# Allegro board DIGITALCONVERTOR.brd
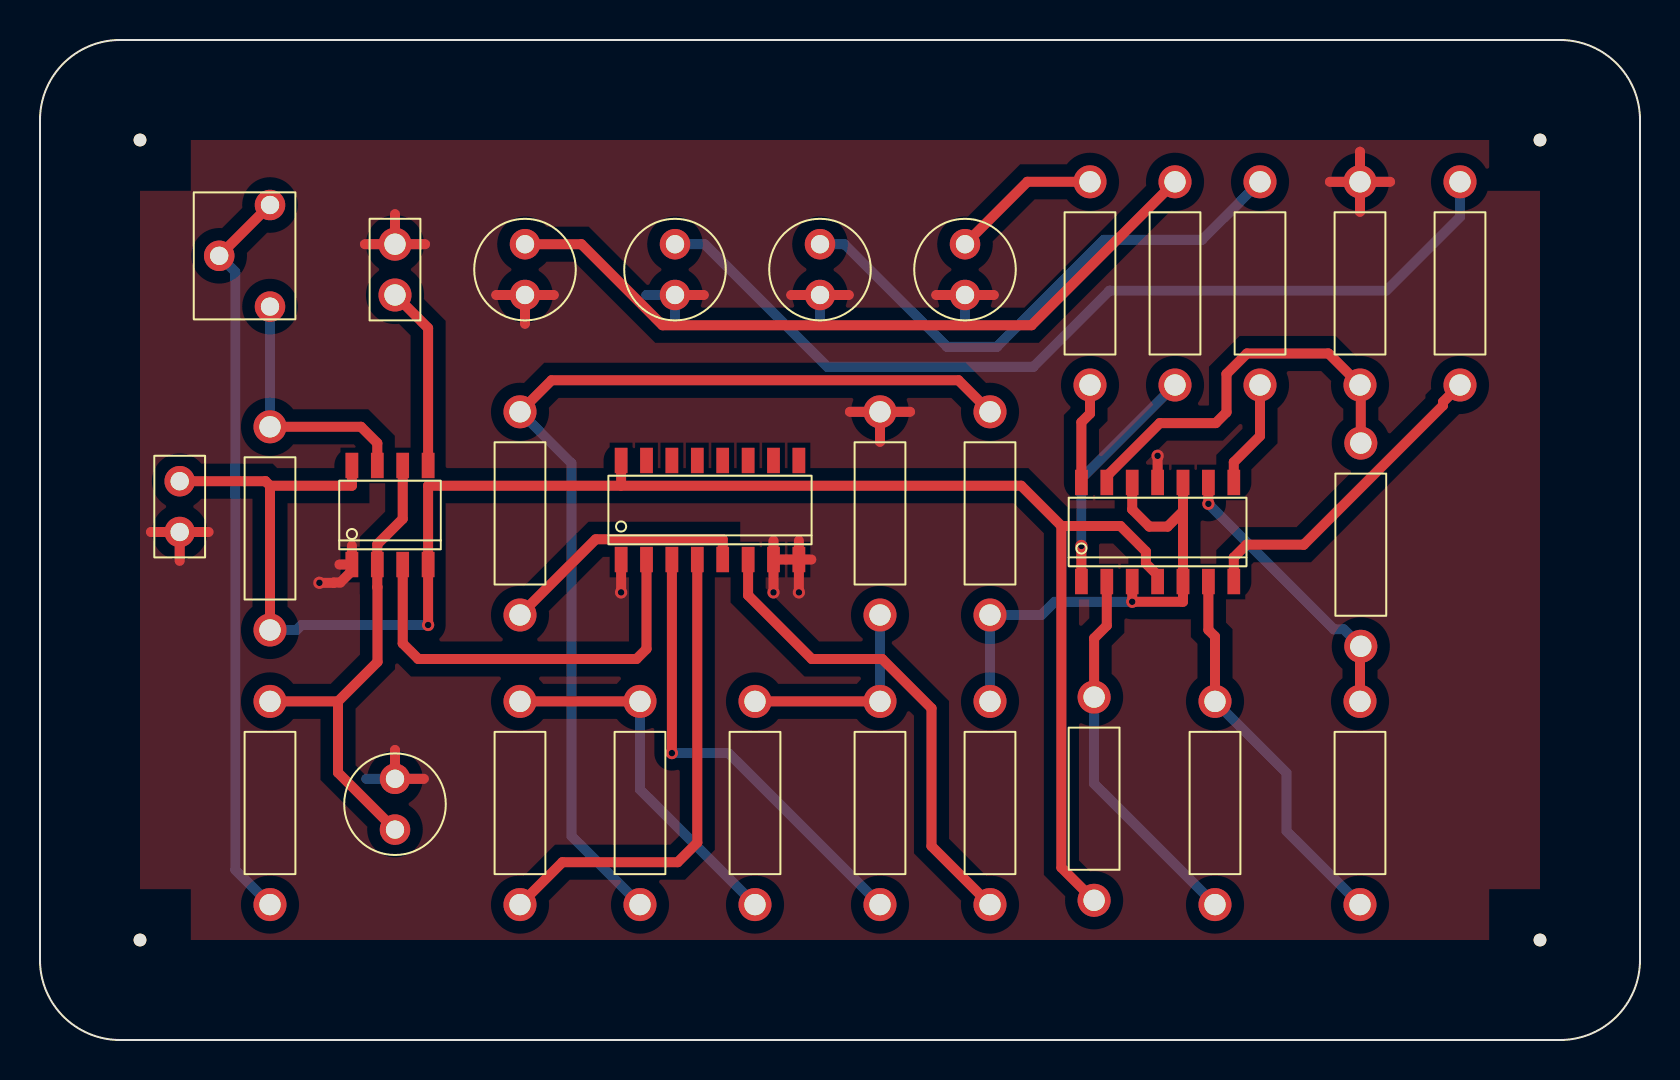
[diagram p0: board, top side]
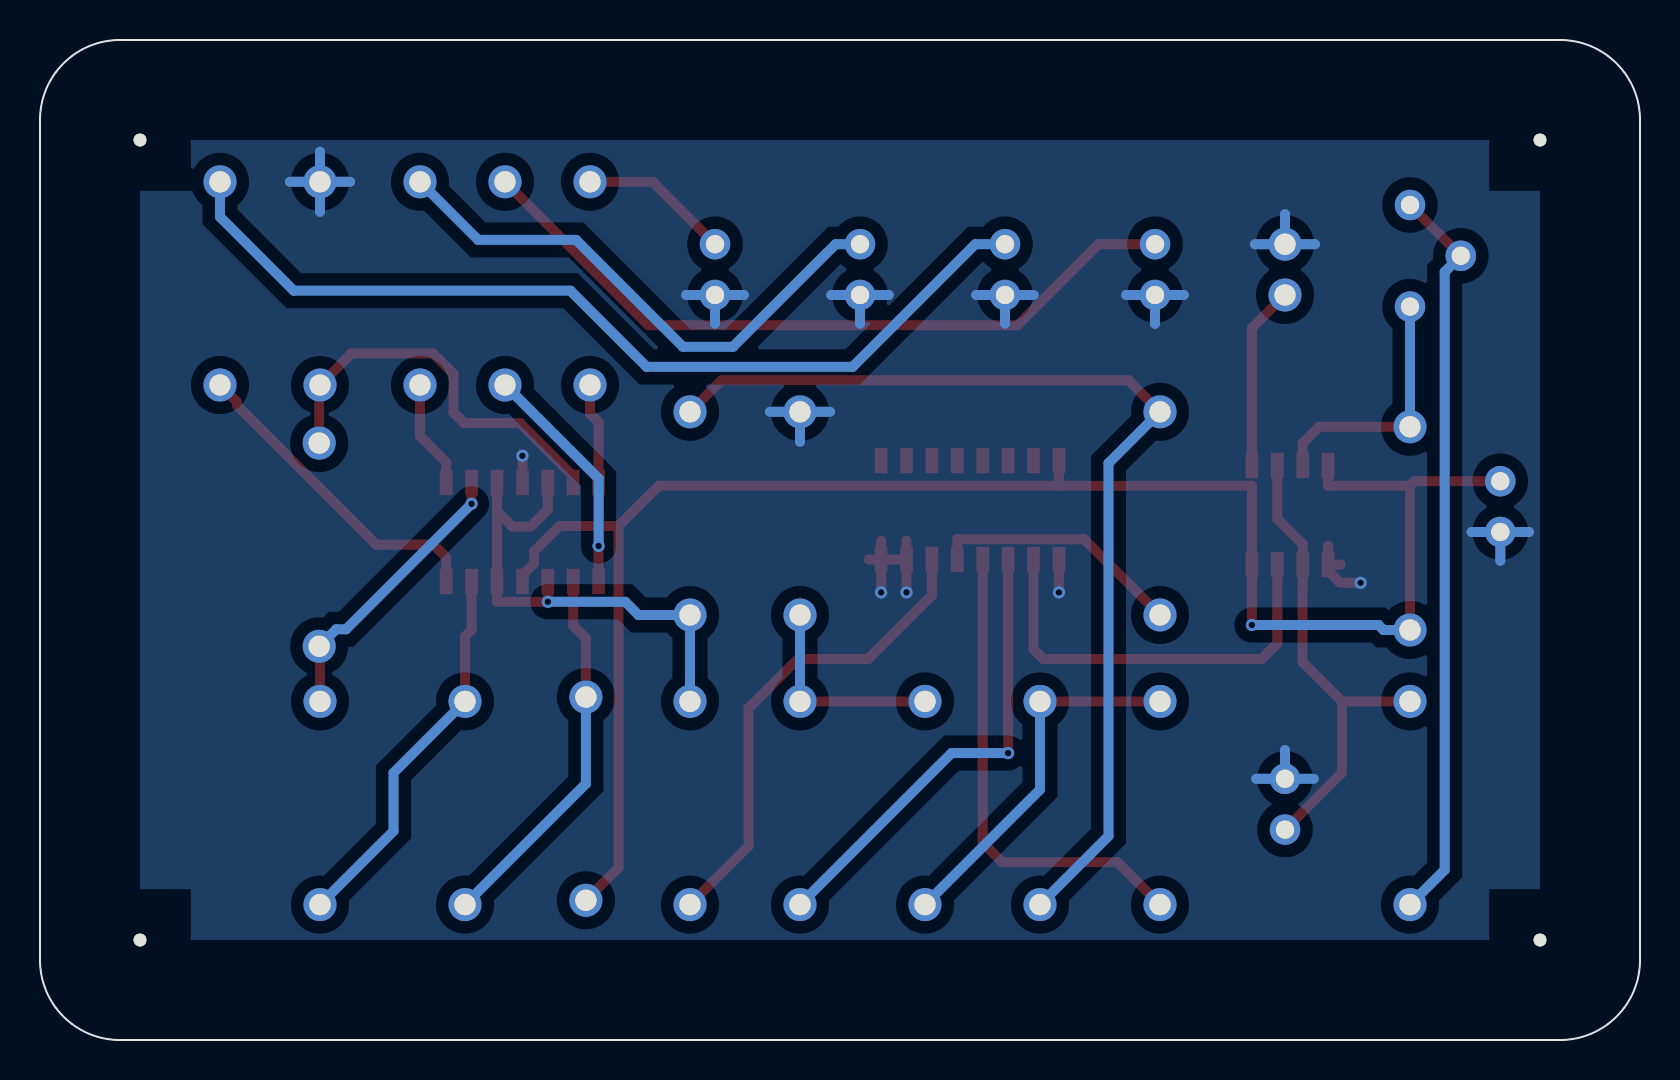
[diagram p1: board, bottom side, seen from below]

Outline 80 x 50 mm; copper layers: TOP, BOTTOM. Coordinates in mm from the lower left corner of the outline.
Outline path: 0,46 0,4 arc(1.17,1.17) 4,0 76,0 arc(78.83,1.17) 80,4 80,46 arc(78.83,48.83) 76,50 4,50 arc(1.17,48.83) 0,46

## Placement (name value [footprint] x y rotation side)
C1  0.01u  [CAPCK05]  17.75 37.25 0 top
C2  1u  [CAP196]  17.75 10.52 0 top
D1  LED  [CAP196]  24.25 37.25 0 top
D2  LED  [CAP196]  31.75 37.25 0 top
D3  LED  [CAP196]  39 37.25 0 top
D4  LED  [CAP196]  46.25 37.25 0 top
J1  CON2  [JUMPER2]  6.99 27.94 270 top
NOREF  -  []  4 50 0 top
NOREF#2  -  [unnamed#2]  75 5 0 top
NOREF#3  -  [unnamed#2]  75 45 0 top
NOREF#4  -  []  0 4 90 top
NOREF#5  -  [unnamed#2]  5 5 0 top
NOREF#6  -  [unnamed#2]  5 45 0 top
R1  10k  [RES400]  11.5 20.5 0 top
R2  20k  [RES400]  47.5 6.77 0 top
R3  RESISTOR VAR  [RESADJ]  11.5 41.75 0 top
R4  10k  [RES400]  47.5 21.25 0 top
R5  20k  [RES400]  24 21.25 0 top
R6  10k  [RES400]  30 6.77 0 top
R7  1M  [RES400]  11.5 6.77 0 top
R8  20k  [RES400]  24 6.77 0 top
R9  10k  [RES400]  35.75 6.77 0 top
R10  20k  [RES400]  42 6.77 0 top
R11  10k  [RES400]  42 21.25 0 top
R12  1k  [RES400]  52.7 6.99 0 top
R13  330  [RES400]  56.75 32.75 0 top
R14  1k  [RES400]  58.75 6.77 0 top
R15  1k  [RES400]  66 6.77 0 top
R16  330  [RES400]  71 32.75 0 top
R17  1k  [RES400]  66.04 19.68 0 top
R18  330  [RES400]  61 32.75 0 top
R19  1k  [RES400]  66 32.75 0 top
R20  330  [RES400]  52.5 32.75 0 top
U1  NE555  [SOIC8]  17.5 26.25 90 top
U2  4520  [SOIC16]  33.5 26.5 90 top
U3  LM324  [SOIC14]  55.88 25.4 90 top

## Library data of the parts
C1 = CAP NP: Tolerance: ***; User Part Number: ***
C2 = C: Tolerance: ***; User Part Number: ***
D1-D4 = LED: Tolerance: ***; User Part Number: ***
J1 = CON2: User Part Number: ***
R1 R2 R4-R20 = R: Tolerance: ***; User Part Number: ***
R3 = RESISTOR VAR: Tolerance: ***; User Part Number: ***
U1 = NE555_0: Tolerance: ***; User Part Number: ***
U2 = 4520_1: Tolerance: ***; User Part Number: ***
U3 = LM324_0: Tolerance: ***; User Part Number: ***

## Footprints (pads in the part's own frame, mm; a bottom-side part is the same pattern mirrored in y, then rotated)
CAP196
  round 1.524 hole 0.914: 1(0,0) 2(0,2.54)
CAPCK05
  round 1.651 hole 1.067: 1(0,0) 2(0,2.54)
JUMPER2
  round 1.524 hole 0.914: 1(0,0) 2(2.54,0)
RES400
  round 1.651 hole 1.067: 1(0,0) 2(0,10.16)
RESADJ
  round 1.524 hole 0.914: 1(0,0) 2(-2.54,-2.54) 3(0,-5.08)
SOIC8
  rect 1.27x0.635 smd: 1(-2.477,1.905) 2(-2.477,0.635) 3(-2.477,-0.635) 4(-2.477,-1.905) 5(2.477,-1.905) 6(2.477,-0.635) 7(2.477,0.635) 8(2.477,1.905)
SOIC14
  rect 1.27x0.635 smd: 1(-2.477,3.81) 2(-2.477,2.54) 3(-2.477,1.27) 4(-2.477,0) 5(-2.477,-1.27) 6(-2.477,-2.54) 7(-2.477,-3.81) 8(2.477,-3.81) 9(2.477,-2.54) 10(2.477,-1.27) 11(2.477,0) 12(2.477,1.27) 13(2.477,2.54) 14(2.477,3.81)
SOIC16
  rect 1.27x0.635 smd: 1(-2.477,4.445) 2(-2.477,3.175) 3(-2.477,1.905) 4(-2.477,0.635) 5(-2.477,-0.635) 6(-2.477,-1.905) 7(-2.477,-3.175) 8(-2.477,-4.445) 9(2.477,-4.445) 10(2.477,-3.175) 11(2.477,-1.905) 12(2.477,-0.635) 13(2.477,0.635) 14(2.477,1.905) 15(2.477,3.175) 16(2.477,4.445)
unnamed#2
  round 0.635 hole 3.175 unplated: (0,0)

## Nets
GND: C1.2 C2.2 D1.1(CATHODE) D2.1(CATHODE) D3.1(CATHODE) D4.1(CATHODE) J1.2 R11.2 R19.2 U1.1(GND) U2.1(CLK) U2.7(RST) U2.8(GND) U3.11(V-)
VCC: J1.1 R1.1 R12.1 U1.4(RST) U1.8(VCC) U2.16(VCC) U3.4(V+)
SIG: R2.2 R4.1 U3.3(IN+) U3.5(IN+) U3.10(IN+) U3.12(IN+)
N00470: R1.2 R3.3(B) U1.7(DSCHG)
N00474: R3.1(A) R3.2(WIPER) R7.1
N00529: C2.1 R7.2 U1.2(TRG) U1.6(THR)
N00675: C1.1 U1.5(CV)
N01165: R2.1 U2.6(Q3)
N01169: R5.1 U2.5(Q2)
N01177: R10.1 U2.3(Q0)
N01317: R8.1 U2.4(Q1)
N01336: R4.2 R5.2 R6.1
N01351: R6.2 R8.2 R9.1
N01365: R9.2 R10.2 R11.1
N02154: R12.2 R14.1 U3.2(IN-)
N02158: R14.2 R15.1 U3.6(IN-)
N02162: R15.2 R17.1 U3.9(IN-)
N02166: R17.2 R19.1 U3.13(IN-)
N02891: R13.1 U3.1(OUT)
N02895: R16.1 U3.7(OUT)
N02899: R18.1 U3.8(OUT)
N02903: R20.1 U3.14(OUT)
N02980: D1.2(ANODE) R13.2
N02984: D2.2(ANODE) R16.2
N02988: D3.2(ANODE) R18.2
N02992: D4.2(ANODE) R20.2
N04575: U1.3(OUT) U2.2(CKE)

Pads without a net: U2 9 10 11 12 13 14 15

## Via types
v1: diameter 0.61, hole 0.33, TOP to BOTTOM, 10 vias

## Routing (per net, layer and track width the routed paths; a pad name or vN(x,y) marks a point on that pad's centre or on a via; arc(x,y) is an arc through that point)
GND: length 88.5
  TOP w0.5: D1.1 25.69,37.25 ; D1.1 24.25,35.81 ; D1.1 22.81,37.25 ; 16.25,39.79 C1.2 ; C1.2 17.75,41.29 ; C1.2 19.25,39.79 ; 6.99,23.96 J1.2 ; J1.2 8.43,25.4 ; J1.2 5.54,25.4 ; R19.2 66,44.41 ; R19.2 66,41.41 ; R19.2 67.5,42.91 ; R19.2 64.5,42.91 ; 40.5,31.41 R11.2 ; R11.2 42,29.91 ; R11.2 43.5,31.41 ; U1.1 15.6,24.71 ; U1.1 15.6,23.46 15.01,22.87 14.69,22.87 14.68,22.86 v1(13.97,22.86) ; U1.1 14.97,23.77 ; 47.69,37.25 D4.1 44.81,37.25 ; D2.1 33.19,37.25 ; U2.8 37.95,24.96 ; U2.8 v1(37.95,22.38) ; U2.8 37.32,24.02 ; U2.8 38.57,24.02 ; 17.75,14.5 C2.2 19.19,13.06 ; U2.7 v1(36.67,22.38) ; U2.7 37.3,24.02 ; U2.7 36.67,24.96 ; 40.44,37.25 D3.1 37.56,37.25 ; U2.1 v1(29.05,22.38) ; U3.11 v1(55.88,29.21)
  BOTTOM w0.5: 5.54,25.4 J1.2 ; J1.2 6.99,23.96 ; J1.2 8.43,25.4 ; 64.5,42.91 R19.2 ; R19.2 66,41.41 ; R19.2 67.5,42.91 ; R19.2 66,44.41 ; D3.1 40.44,37.25 ; D3.1 39,35.81 ; D3.1 37.56,37.25 ; 16.31,13.06 C2.2 ; C2.2 19.19,13.06 ; C2.2 17.75,14.5 ; 42,29.91 R11.2 ; R11.2 43.5,31.41 ; R11.2 40.5,31.41 ; D1.1 25.69,37.25 ; D1.1 24.25,35.81 ; D1.1 22.81,37.25 ; C1.2 17.75,41.29 ; C1.2 19.25,39.79 ; C1.2 16.25,39.79 ; 30.31,37.25 D2.1 ; D2.1 33.19,37.25 ; D2.1 31.75,35.81 ; D4.1 47.69,37.25 ; D4.1 44.81,37.25 ; D4.1 46.25,35.81
VCC: length 91.6
  TOP w0.5: U2.16 29.05,27.71 ; 29.05,27.71 19.41,27.71 U1.4 v1(19.41,20.75) ; 29.05,27.71 49.06,27.71 51.07,25.7 ; R12.1 51.07,8.62 51.07,25.7 ; J1.1 11.27,27.94 11.5,27.71 ; 51.07,25.7 54.02,25.7 55.3,24.43 55.3,23.83 55.88,23.24 U3.4 ; 11.5,27.71 15.6,27.71 U1.8 ; 11.5,27.71 R1.1
  BOTTOM w0.5: v1(19.41,20.75) 13.08,20.75 12.83,20.5 R1.1
SIG: length 25.8
  TOP w0.5: 57.15,26.44 56.38,25.67 55.47,25.67 54.61,26.53 U3.12 ; 57.15,26.44 U3.10 ; 57.15,26.44 U3.5 57.15,21.91 v1(54.61,21.91) U3.3
  BOTTOM w0.5: v1(54.61,21.91) 50.74,21.91 50.08,21.25 R4.1 R2.2
N00470: length 12.8
  TOP w0.5: R1.2 16.05,30.66 16.86,29.84 U1.7
  BOTTOM w0.5: R3.3 R1.2
N00474: length 37.1
  TOP w0.5: R3.1 R3.2
  BOTTOM w0.5: R7.1 9.77,8.5 9.77,38.4 R3.2
N00529: length 24.1
  TOP w0.5: 14.9,16.93 16.88,18.9 16.88,22.64 16.86,22.65 U1.2 16.86,24.79 18.14,26.06 U1.6 ; 14.9,16.93 14.9,13.37 C2.1 ; 14.9,16.93 R7.2
N00675: length 9.2
  TOP w0.5: U1.5 19.41,35.59 C1.1
N01165: length 24.3
  TOP w0.5: R2.1 44.58,9.69 44.58,16.58 42.11,19.05 38.59,19.05 35.41,22.24 U2.6
N01169: length 12.7
  TOP w0.5: R5.1 27.79,25.04 34.13,25.04 U2.5
N01177: length 23.2
  TOP w0.5: U2.3 v1(31.59,14.35)
  BOTTOM w0.5: R10.1 34.42,14.35 v1(31.59,14.35)
N01317: length 24.3
  TOP w0.5: R8.1 26.12,8.89 31.89,8.89 32.87,9.87 U2.4
N01336: length 51.9
  TOP w0.5: R4.2 45.92,32.99 25.58,32.99 R5.2
  BOTTOM w0.5: R6.1 26.58,10.19 26.58,28.83 R5.2
N01351: length 18.5
  TOP w0.5: R8.2 R6.2
  BOTTOM w0.5: R9.1 30,12.52 R6.2
N01365: length 10.6
  TOP w0.5: R9.2 R10.2
  BOTTOM w0.5: R11.1 R10.2
N02154: length 18.9
  TOP w0.5: U3.2 53.34,20.72 52.7,20.09 R12.2
  BOTTOM w0.5: R14.1 52.7,12.81 R12.2
N02158: length 19.3
  TOP w0.5: U3.6 58.42,20.51 58.75,20.18 R14.2
  BOTTOM w0.5: R15.1 62.33,10.44 62.33,13.35 R14.2
N02162: length 14.4
  TOP w0.5: U3.9 v1(58.42,26.81) ; R15.2 66,19.64 R17.1
  BOTTOM w0.5: R17.1 65.19,20.54 64.69,20.54 v1(58.42,26.81)
N02166: length 20.2
  TOP w0.5: U3.13 53.34,28.19 55.99,30.84 58.79,30.84 59.33,31.39 59.33,33.3 60.35,34.33 64.42,34.33 R19.1 66.04,32.71 R17.2
N02891: length 11.8
  TOP w0.5: U3.1 v1(52.07,24.7)
  BOTTOM w0.5: R13.1 52.07,28.07 v1(52.07,24.7)
N02895: length 16.2
  TOP w0.5: U3.7 59.69,24.13 60.33,24.77 63.19,24.77 70.15,31.73 70.15,31.9 R16.1
N02899: length 5.4
  TOP w0.5: R18.1 61,30.2 59.69,28.89 U3.8
N02903: length 5.1
  TOP w0.5: U3.14 52.07,30.89 52.5,31.32 R20.1
N02980: length 37.1
  TOP w0.5: R13.2 49.58,35.74 31.12,35.74 27.07,39.79 D1.2
N02984: length 46.7
  BOTTOM w0.5: D2.2 33.23,39.79 39.37,33.66 49.66,33.66 53.48,37.47 67.31,37.47 71,41.16 R16.2
N02988: length 27.5
  BOTTOM w0.5: D3.2 40.22,39.79 45.35,34.66 47.85,34.66 53.2,40.01 58.09,40.01 R18.2
N02992: length 7.5
  TOP w0.5: R20.2 49.37,42.91 D4.2
N04575: length 21.1
  TOP w0.5: U2.2 30.32,19.55 29.82,19.05 18.91,19.05 18.14,19.83 U1.3

## Copper pours and planes (outline as drawn; the poured copper is in the pictures)
GND on TOP, BOTTOM: 5,5 5,45 75,45 75,5

## Text on the board
DIMENSION: FIGURE | SIZE | 0.3302 | 0.9144 | 1.0668 | 3.175 | DRILL CHART: TOP to BOTTOM | ALL UNITS ARE IN MILLIMETERS | PLATED | NON-PLATED | QTY | 10 | 15 | 40 | 4
